# Altium PCB TSAL_Control.PcbDoc (part 3 of 3)
Units mm, origin at the board's own origin, x right, y up, seen from the top; angles counter-clockwise.
Board outline 110 x 55.6 mm, 4 copper layers (Top Layer, GND, PWR, Bottom Layer), stack 1.488 mm thick; 121 components, 67 nets, 352 pads, 66 vias.
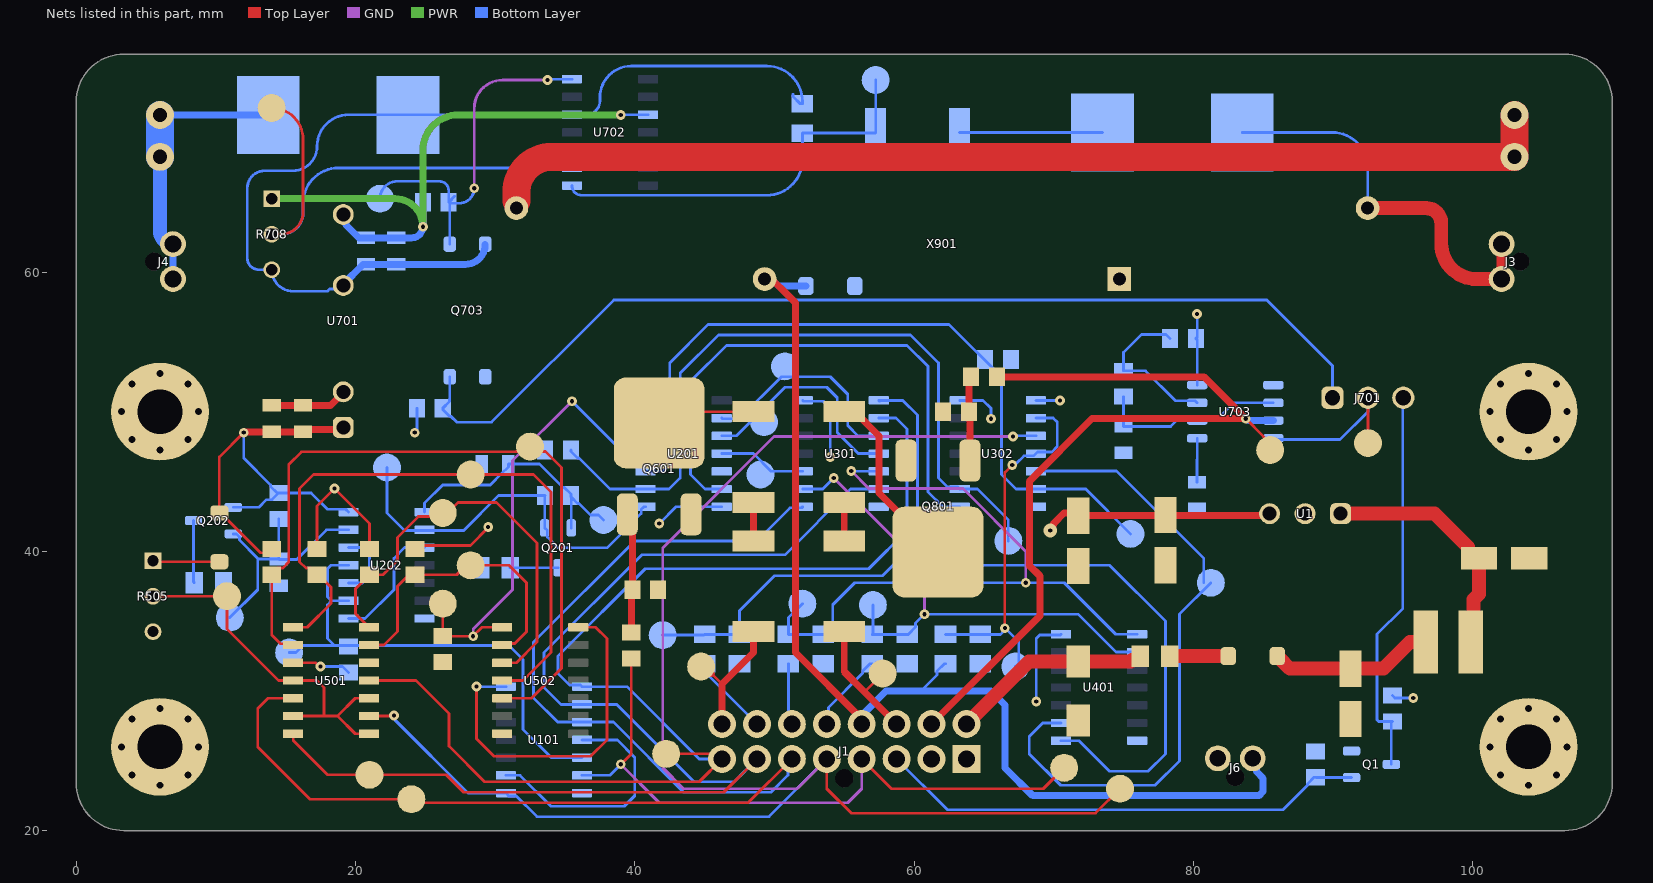
[diagram p4: the nets of this part, all layers, seen from the top]

## Part data (continued)
U301: library part CMP-00216-1, "XOR Gate, 4000/14000/40000 Series, 4-Func, 2-Input, CMOS, PDSO14", Case/Package=SOP, Load Capacitance (CL)=50pF, Max Operating Temperature=125°C, Max Supply Voltage=18V, Min Operating Temperature=-55°C, Min Supply Voltage=3V, Nominal Supply Voltage=5V, Package Body Material=Plastic, Package Equivalence Code=SOP14,.25, Package Shape=Rectangular, Package Style="SMALL OUTLINEMeter", Peak Reflow Temperature (Cel)=260°C, Power Supplies=5/15V, Temperature Grade=MILITARY, Channels=4, Height - Seated (Max)=1.75mm, JESD-30 Code=R-PDSO-G14, JESD-609 Code=e4, Length=8.65mm, Logic Type="XOR GATE", Moisture Sensitivity Level=1, Number of Inputs=2, Packaging="Tape and Reel", Pins=14, Prop. Delay@Nom-Sup=280ns, Propagation Delay (tpd)=280ns, Qualification Status="Not Qualified", Reach SVHC Compliant=Yes, RoHS Compliant=Yes, Schmitt Trigger=No, Surface Mount=Yes, Technology=CMOS, Terminal Finish=Nickel, Terminal Form="Gull Wing", Terminal Pitch=1.27mm, Terminal Position=DUAL, Width=3.9mm
U401: library part CMP-00215-1, "NAND Gate, 4000/14000/40000 Series, 3-Func, 3-Input, CMOS, CDIP14", Case/Package=DIP, Max Operating Temperature=125°C, Max Supply Voltage=15V, Min Operating Temperature=-55°C, Min Supply Voltage=5V, Nominal Supply Voltage=10V, Package Body Material=Metal, Package Shape=Rectangular, Package Style=IN-LINEMeter, Temperature Grade=MILITARY, Channels=3, Height - Seated (Max)=5.08mm, Logic Type="NAND GATE", Number of Inputs=3, Pins=14, Propagation Delay (tpd)=250ns, Qualification Status="Not Qualified", Surface Mount=No, Technology=CMOS, Terminal Form="Through Hole", Terminal Pitch=2.54mm, Terminal Position=DUAL, Width=7.62mm
U501 U702: library part CMP-014-00006-1, "Comparator, 4 Func, 5000uV Offset-Max, 300ns Response Time, BIPolar, PDSO14", Case/Package=SOP, Max Operating Temperature=70°C, Min Operating Temperature=0°C, Nominal Supply Voltage=5V, Channels=4, Output Type=OPEN-COLLECTOR, Pins=14, RoHS Compliant=Yes
U701: library part CMP-019-00001-1, "WPME-FISM Fixed Isolated SIP/SMT Module"
U703: library part CMP-00181-3, "Precision timer for -55 to 85C operation 8-SOIC -40 to 85", Case/Package=SOIC, Frequency=500kHz, High Level Output Current=-200mA, Low Level Output Current=200mA, Manufacturer="Texas Instruments", Manufacturer Part Number=SA555D, Max Operating Temperature=85°C, Max Supply Voltage=16V, Min Operating Temperature=-40°C, Min Supply Voltage=4.5V, Nominal Supply Current=2mA, Operating Supply Current=10mA, Package Quantity=75, Quiescent Current=15mA, .Creator=DO, Category="Timers and Oscillators", ComponentLink1Description=https://datasheet.ciiva.com/1147/na555-1147816.pdf?src-supplier=Newark, ComponentLink1URL=https://datasheet.ciiva.com/1147/na555-1147816.pdf?src-supplier=Newark, ComponentLink2Description=https://datasheet.ciiva.com/14094/ne555-series-eng-tds-14094951.pdf?src-supplier=Distrelec, ComponentLink2URL=https://datasheet.ciiva.com/14094/ne555-series-eng-tds-14094951.pdf?src-supplier=Distrelec, ComponentLink3Description=https://datasheet.ciiva.com/1233/sa555-1233455.pdf?src-supplier=Digi-Key, ComponentLink3URL=https://datasheet.ciiva.com/1233/sa555-1233455.pdf?src-supplier=Digi-Key, ComponentLink4Description=https://datasheet.ciiva.com/1139/1851962-1139987.pdf?src-supplier=Element14, ComponentLink4URL=https://datasheet.ciiva.com/1139/1851962-1139987.pdf?src-supplier=Element14, ComponentLink5Description=https://datasheet.ciiva.com/15152/getdatasheetpartid-75292-15152565.pdf?src-supplier=Verical, ComponentLink5URL=https://datasheet.ciiva.com/15152/getdatasheetpartid-75292-15152565.pdf?src-supplier=Verical, ComponentLink6Description="Where buy it", ComponentLink6URL=https://www.mouser.es/ProductDetail/Texas-Instruments/SA555D?qs=gb35HGp1gQJkvy2FEVqR%2Fw%3D%3D, Contact Plating=Gold, Design Item ID=Timer_SA555, Height=1.58mm, Lead Free="Lead Free", Length=4.9mm, Mount="Surface Mount", Number of Pins=8, Number of Timers/Counters=1, Packaging=Rail/Tube, Pricing 1="1=0,93000, 10=0,83500, 25=0,79240, 100=0,65090, 250=0,60848, 500=0,53774, 1000=0,46725 (USD)", Radiation Hardening=No, REACH SVHC="No SVHC", RoHS=Yes, RoHS Compliant=Yes, Source="Integrated circuits.SchLib", Stock 1=1162, Weight=0.002561oz, Width=3.91mm
X901: library part CMP-00224-2, "Dry Reed Relay, SPST-NC, 3500V switching voltage, 3A, 10kV isolation coil-contacts, 5504-24-1", JESD-609 Code=e3, Reach SVHC Compliant=Yes, Relay Type="DRY REED RELAY", RoHS Compliant=Yes, Terminal Finish=Tin

## Via types
v1: diameter 0.7, hole 0.5, Top Layer to Bottom Layer, tented both sides, 32 vias
v2: diameter 0.7, hole 0.3, Top Layer to Bottom Layer, tented both sides, 29 vias
v3: diameter 1.5, hole 1.5, Top Layer to Bottom Layer, tented both sides, 4 vias
v4: diameter 1, hole 0.3, Top Layer to Bottom Layer, tented both sides, 1 vias

## Nets (pads, with @x,y where several pads share a name; then routed paths per layer and width w, separated by ;. In a path a pad name is that pad's centre, name@x,y a point inside that pad or via, vN(x,y) a via of type N, cw(c..) or ccw(c..) an arc to the next point about the centre after c; other vN are vias at no path point)
+5TS: C701.1 C702.1 R706.1 R708.1 U701.4 U702.3 | length 43.9
  PWR w0.5: R708.1@14,65.25 22.825,65.25 cw(c22.825,63.25) v2(24.825,63.25) 24.825,68.71 cw(c27.365,68.71) 27.365,71.25 v2(39,71.25)
  Bottom Layer w0.2: v2(39,71.25) 39.02,71.27 U702.3@40.95,71.27
  Bottom Layer w0.5: U701.4@19.125,64.12 19.316,63.929 19.316,63.384 20.25,62.45 C701.1@22.921,62.45 ; C701.1@22.921,62.45 24.025,62.45 ccw(c24.025,63.25) v2(24.825,63.25) R706.1@24.825,65
+12: C3.1 C4.1 C703.1 C704.1 D501.K J1.7 Q202.G R1.1 R111.2 R202.1 R501.1 R502.1 R503.1 R504.1 R702.1 R704.1 U1.3 U101.14 U201.14 U202.14 U301.14 U302.1 U302.14 U401.14 U501.3 U502.14 U701.1 U703.8 | length 126.5
  Top Layer w0.2: v2(12,48.5) 10.25,46.75 D501.K@10.25,42.75 10.35,42.75 13.2,39.9 13.725,39.9 R502.1@14,40.175 ; U501.3@15.525,32.02 17.133,32.02 v2@17.403,31.75 ; R501.1@17.25,40.175 17.25,43.25 v2(18.5,44.5) 21,42 R503.1@21,40.175 ; R504.1@24.5,40.175 24.75,40.425 28.234,40.425 29.5,41.691 v2(29.5,41.75) ; v2(28.669,30.328) 28.669,26.581 29.919,25.331 36.831,25.331 38,26.5 38,33.75 37.19,34.56 U502.14@35.95,34.56
  Top Layer w0.5: v2(12,48.5) 12.054,48.5 12.104,48.55 C703.1@14,48.55 C704.1@16.25,48.55 16.415,48.715 18.96,48.715 U701.1@19.125,48.88 ; v4(69.75,41.5) 69.75,41.635 70,41.885 70,42 70.75,42.75 71.55,42.75 C3.1@71.75,42.55 85.31,42.55 U1.3@85.46,42.7
  Bottom Layer w0.2: Q202.G@11.25,43.15 13.069,43.15 13.619,43.7 14.025,43.7 R202.1@14.5,44.175 ; v2(12,48.5) 12,46.675 13.925,44.75 13.925,44.65 14.4,44.175 R202.1@14.5,44.175 ; v2(17.5,31.75) 19.075,31.75 R111.2@19.5,31.325 ; U202.14@19.5,42.81 19.3,43.01 17.99,43.01 16.825,44.175 R202.1@14.5,44.175 ; v2(24.25,48.5) 24.4,48.65 R702.1@24.4,50.25 ; v2(28.669,30.328) 28.672,30.328 28.75,30.25 28.81,30.31 U101.14@30.775,30.31 ; v2@41.768,42 42.958,43.19 U201.14@46.225,43.19 ; U301.14@52.025,50.81 52.085,50.75 53.5,50.75 54,50.25 v2(54,46.75) ; U302.14@63.275,50.81 64.94,50.81 65.5,50.25 v2(65.5,49.5) ; U302.1@68.725,50.81 v2(70.44,50.81) ; v2(68.75,29.25) 68.75,33.75 69,34 70.465,34 U401.14@70.525,34.06 ; v2(80.25,57) 80.275,56.975 80.275,55.35 R704.1@80.175,55.25 80.275,55.15 U703.8@80.275,51.905 ; R1.1@94.25,29.675 94.425,29.5 v2(95.75,29.5)
  other v2: 41.75,42
AIR+_Coil: AIR+_COIL.1 R3.2 R4.1 U301.1 U401.8 | length 73.9
  Bottom Layer w0.2: AIR+_COIL.1@42,34 44.95,34 R3.2@45,34.05 R4.1@47.5,34.05 47.5,35.75 50,38.25 57.75,38.25 58.5,39 ; U301.1@57.535,50.75 U301.1@57.475,50.81 59.19,50.81 60.25,49.75 60.25,40.75 58.5,39 ; U401.8@70.525,26.44 71.81,26.44 74,24.25 76.75,24.25 78,25.5 78,35 74,39 58.5,39
AIR+_Coil_30V: J1.10 R3.1 | length 5.9
  Bottom Layer w0.2: R3.1@45,31.95 45.238,31.712 45.238,31.142 J1.10@48.75,27.631
AIR+_Implausibility: AIR+_IMPL.1 U201.9 U301.3 | length 15.6
  Bottom Layer w0.2: U201.9@46.225,49.54 46.265,49.5 47.5,49.5 50.5,52.5 54,52.5 55.25,51.25 55.25,49 55.98,48.27 U301.3@57.475,48.27
AIR+_SCS: AIR+_SCS.1 R502.2 U501.2 U502.5 | length 55
  Top Layer w0.2: U501.2@15.525,33.29 15.432,33.383 14.617,33.383 14,34 R502.2@14,38.325 14.475,38.8 14.8,38.8 15.225,39.225 15.225,46.225 16.125,47.125 31.483,47.125 31.513,47.156 32.094,47.156 32.125,47.125 AIR+_SCS.1@32.5,47.5 32.844,47.156 33.594,47.156 34.75,46 34.75,31.628 32.602,29.48 U502.5@30.5,29.48
AIR+_State: AIR+_STATE.1 J1.1 U101.1 U301.2 U501.11 | length 88.3
  Top Layer w0.2: U501.11@20.975,30.75 24.338,30.75 26.7,28.388 26.7,26.05 29.25,23.5 44.619,23.5 J1.1@46.25,25.131 45.763,25.131 45.393,25.5 AIR+_STATE.1@42.25,25.5
  Bottom Layer w0.2: J1.1@46.25,25.131 44.619,25.131 39.44,30.31 U101.1@36.225,30.31 36.108,30.427 35.323,30.427 34.5,31.25 34.5,32.5 40.75,38.75 56.75,38.75 59.5,41.5 59.5,48.75 58.71,49.54 U301.2@57.475,49.54
AIR-_Coil: AIR-_COIL.1 R5.2 R6.1 U301.5 U401.1 | length 50.7
  GND w0.2: v2@55.51,45.74 56.75,44.5 63.5,44.5 68,40 v2(68,37.75)
  Bottom Layer w0.2: AIR-_COIL.1@52,36.25 51,35.25 R5.2@51,34.05 53.5,34.05 53.65,34.05 54.175,34.575 54.175,36.175 55.75,37.75 70.75,37.75 74.44,34.06 U401.1@75.975,34.06 ; v2(55.5,45.75) 55.52,45.73 U301.5@57.475,45.73
AIR-_Coil_30V: J1.11 R5.1 | length 4.4
  Bottom Layer w0.2: R5.1@51,31.95 51,27.881 J1.11@51.25,27.631
AIR-_Implausibility: AIR-_IMPL.1 U201.10 U301.4 | length 16.1
  Bottom Layer w0.2: U201.10@46.225,48.27 47.27,48.27 50.75,51.75 53.75,51.75 54.5,51 54.5,48.5 56,47 U301.4@57.475,47
AIR-_SCS: AIR-_SCS.1 R503.2 U501.14 U502.3 | length 31.3
  Top Layer w0.2: U501.14@20.975,34.56 20,35.535 20,37.325 R503.2@21,38.325 21.975,38.325 23,39.35 23,41 24.5,42.5 26.164,42.5 AIR-_SCS.1@26.414,42.75 ; AIR-_SCS.1@26.25,42.75 AIR-_SCS.1@26.414,42.75 ; U502.3@30.5,32.02 31.52,32.02 33,33.5 33,40.599 30.099,43.5 27.338,43.5 26.588,42.75 AIR-_SCS.1@26.414,42.75
AIR-_State: AIR-_STATE.1 J1.2 U101.2 U301.6 U501.7 | length 86.3
  Top Layer w0.2: U501.7@15.525,26.94 15.543,26.922 15.543,26.457 18,24 AIR-_STATE.1@21,24 26.5,24 27.75,22.75 46.369,22.75 J1.2@48.75,25.131
  Bottom Layer w0.2: J1.2@48.75,25.131 47.119,23.5 44.25,23.5 38.71,29.04 U101.2@36.225,29.04 34.71,29.04 33.5,30.25 33.5,32.75 40.5,39.75 50.75,39.75 55.46,44.46 U301.6@57.475,44.46
Discharge_Resistor: J2.1 J2.2 X901.1 | length 76.6
  Top Layer w2: X901.1@31.52,65.08 31.52,65.71 cw(c34.06,65.71) 34.06,68.25 J2.1@103,68.25 J2.2@103,71.25
GND: C1.2 C2.2 C3.2 C4.2 C201.2 C202.2 C703.2 C704.2 C705.2 C706.2 D1.2 D901.A J1.8 J6.1 MH1.1 MH2.1 MH3.1 MH4.1 Q1.S Q601.S Q703.3 Q801.S R2.2 R4.2 R6.2 R8.2 R10.2 R203.2 R204.2 R333.1 R444.1 R505.2 R555.1 R602.2 R802.2 U1.2 U101.7 U201.5 U201.7 U201.12 U202.7 U301.7 U302.7 U401.7 U501.12 U502.7 U701.2 U703.1 X901.3 | length 11.1
  Top Layer w0.2: v1(3.25,26) MH1.1@6,26
  Top Layer w0.5: C703.2@14,50.45 C704.2@16.25,50.45 18.207,50.45 19.125,51.368 U701.2@19.125,51.42 ; MH3.1@104,50 v1(104,52.75)
  other v1: 6,23.25 104,23.25 4,24 8,24 102,24 106,24 8.75,26 101.25,26 106.75,26 4,28 8,28 102,28 106,28 6,28.75 104,28.75 6,47.25 104,47.25 4,48 8,48 102,48 106,48 3.25,50 8.75,50 101.25,50 106.75,50 4,52 8,52 102,52 106,52 6,52.75
HV_Accu_SCS: HV_ACCU_SCS.1 R501.2 U501.1 U502.4 | length 47.6
  Top Layer w0.2: U501.1@15.525,34.56 16.55,34.56 18.25,36.26 18.25,37.425 17.35,38.325 R501.2@17.25,38.325 16.775,38.8 16.45,38.8 16,39.25 16,44.5 17,45.5 32.75,45.5 34,44.25 34,32.75 32,30.75 U502.4@30.5,30.75
HV_Accumulator: HV_ACCU.1 J1.4 U101.8 U302.3 U501.9 | length 121.3
  Top Layer w0.2: U501.9@20.975,28.21 22.71,28.21 v2(22.75,28.25) ; J1.4@53.75,25.131 53.75,23 55.5,21.25 73,21.25 HV_ACCU.1@74.75,23
  GND w0.2: J1.4@53.75,25.131 51.619,23 43.5,23 42,24.5 42,40.25 49.981,48.231 v2(67.081,48.231)
  Bottom Layer w0.2: v2(22.75,28.25) 22.846,28.154 22.846,27.904 28.06,22.69 U101.8@30.775,22.69 30.975,22.49 31.51,22.49 33,21 49.619,21 J1.4@53.75,25.131 ; v2(67.081,48.231) 67.231,48.231 67.27,48.27 U302.3@68.725,48.27
HV_Detection_DCBus: J701.1 Q703.4 R702.2 | length 74.5
  Bottom Layer w0.2: Q703.4@26.75,52.5 26.75,50.942 26.725,50.917 26.725,50.725 R702.2@26.25,50.25 26.25,50.15 26.725,49.675 26.825,49.675 27.25,49.25 29.75,49.25 38.5,58 85.25,58 89.96,53.29 J701.1@89.96,51
HV_Detection_Trigger: HV_DET_TRIG.1 J701.2 U703.4 | length 11.9
  Top Layer w0.2: HV_DET_TRIG.1@92.5,47.75 J701.2@92.5,51
  Bottom Layer w0.2: U703.4@85.725,48.095 85.82,48 90.5,48 92.5,50 J701.2@92.5,51
Implausibilities: C201.1 IMPLAUSIBILITIES.1 Q201.S R201.2 U202.1 | length 18.7
  Bottom Layer w0.2: U202.1@24.95,42.81 24.95,43.45 26.25,44.75 29.65,44.75 30.467,45.567 30.95,46.05 C201.1@30.95,46.25 33.175,46.25 34.85,44.575 34.95,44.575 35.425,44.1 R201.2@35.425,44 35.425,43.9 R201.2@35.45,43.875 ; Q201.S@35.45,41.675 R201.2@35.45,43.875 ; IMPLAUSIBILITIES.1@37.75,42.25 37.406,42.594 36.831,42.594 36,43.425 35.9,43.425 R201.2@35.45,43.875
Implausibilities_Undelayed: IMPL_UNDLY.1 Q201.G R201.1 U201.1 U202.2 | length 27.9
  Bottom Layer w0.2: IMPL_UNDLY.1@22.25,46 22.25,42.75 23.5,41.5 27.75,41.5 30.25,44 R201.1@33.575,44 33.55,43.975 Q201.G@33.55,41.675 33.736,41.489 33.736,41.014 34.5,40.25 38,40.25 40.457,42.707 40.457,42.99 40.657,43.19 U201.1@40.775,43.19
INV_HV_Detection: J701.3 Q1.D R1.2 | length 28.1
  Bottom Layer w0.2: Q1.D@94.175,24.75 94.175,27.75 R1.2@94.25,27.825 93.275,27.825 93.158,27.942 93.158,34.069 95,35.912 95,50.96 J701.3@95.04,51
INV_HV_Detection5V: J1.6 Q1.G R2.1 | length 35.1
  Bottom Layer w0.2: J1.6@58.75,25.131 62.381,21.5 86.425,21.5 88.175,23.25 88.175,23.35 88.65,23.825 R2.1@88.75,23.825 88.775,23.8 Q1.G@91.325,23.8
Latch_Reset: C202.1 LATCH_RST.1 Q202.S R202.2 U202.13 | length 18
  Bottom Layer w0.2: LATCH_RST.1@11,35.25 13,37.25 13,39.5 ; Q202.S@11.25,41.25 11.469,41.25 11.69,41.03 11.69,40.81 13,39.5 ; R202.2@14.5,42.325 C202.1@14.5,39.45 ; U202.13@19.5,41.54 17.923,41.54 15.79,39.407 14.543,39.407 C202.1@14.5,39.45 ; 13,39.5 13.05,39.45 C202.1@14.5,39.45
LV+_in: D1.1 F1.1 J1.16 | length 14.6
  Top Layer w1: J1.16@63.75,27.631 68.22,32.1 D1.1@71.75,32.1 75.489,32.1 75.614,32.225 76.075,32.225 76.2,32.35 F1.1@76.2,32.5
NetC1_1: C1.1 D2.K L1.1 | length 11.8
  Top Layer w1: D2.K@86,32.5 86,32.4 86.05,32.35 86.15,32.35 86.9,31.6 C1.1@91.25,31.6 93.6,31.6 95.5,33.5 L1.1@96.625,33.5
NetC2_1: C2.1 L1.2 U1.1 | length 17.8
  Top Layer w1: U1.1@90.54,42.7 97.25,42.7 99.65,40.3 99.65,39.8 99.95,39.5 C2.1@100.45,39.5 100.45,36.95 100.061,36.561 100.061,33.686 L1.2@99.875,33.5
NetC705_1: C705.1 U703.5 | length 3.2
  Bottom Layer w0.2: C705.1@80.25,44.95 80.25,46.587 80.275,46.612 U703.5@80.275,48.095
NetC706_1: C706.1 R705.2 U703.2 U703.6 | length 13.5
  Bottom Layer w0.2: R705.2@75,51.075 C706.1@75,48.95 78.374,48.95 78.789,49.365 U703.6@80.275,49.365 81.615,49.365 82.885,50.635 U703.2@85.725,50.635
NetD2_A: D2.A F1.2 | length 4.2
  Top Layer w1: F1.2@78.3,32.5 D2.A@82.5,32.5
NetD501_A: D501.A R505.1 | length 4.8
  Top Layer w0.2: R505.1@5.5,39.33 5.58,39.25 D501.A@10.25,39.25
NetQ201_D: Q201.D R203.1 | length 3.5
  Bottom Layer w0.2: R203.1@31.071,38.829 R203.1@31.141,38.829 ; R203.1@31.141,38.9 31.216,38.825 Q201.D@34.5,38.825
NetQ202_D: Q202.D R204.1 | length 4.5
  Bottom Layer w0.2: Q202.D@8.4,42.2 8.4,37.8 R204.1@8.45,37.75
NetQ601_D: Q601.D R604.2 | length 7.1
  Top Layer w0.2: Q601.D@41.75,49.2 42.55,50 R604.2@48.5,50
NetQ601_G: Q601.G R601.2 R602.1 | length 8.7
  Top Layer w0.5: Q601.G@39.464,42.65 39.825,42.289 R602.1@39.825,37.25 39.75,37.175 R601.2@39.75,34.175
NetQ801_D: Q801.D R804.2 | length 13.3
  Top Layer w0.5: R804.2@55,50 55.75,50 57.5,48.25 57.5,44.164 Q801.D@61.714,39.95
NetQ801_G: Q801.G R801.2 R802.1 | length 6.1
  Top Layer w0.5: Q801.G@64,46.5 64,49.925 R802.1@63.925,50 63.925,52.35 R801.2@64.075,52.5
NetR603_2: R603.2 R604.1 | length 2.7
  Top Layer w0.5: R603.2@48.5,40.75 R604.1@48.5,43.5
NetR704_2: R704.2 R705.1 U703.7 | length 11.5
  Bottom Layer w0.2: R704.2@78.325,55.25 78.05,55.525 76.275,55.525 75,54.25 R705.1@75,52.925 76.575,52.925 78.714,50.786 80.124,50.786 U703.7@80.275,50.635
NetR803_2: R803.2 R804.1 | length 2.7
  Top Layer w0.5: R803.2@55,40.75 R804.1@55,43.5
NetU101_4: U101.4 U101.9 | length 17.5
  Bottom Layer w0.2: U101.9@30.775,23.96 31.79,23.96 34,21.75 39.25,21.75 40,22.5 40,25.25 38.75,26.5 U101.4@36.225,26.5
No_Voltage_Relays_Closed: NO_HV_REL_CLS.1 R444.2 U201.3 U302.6 | length 53.6
  Bottom Layer w0.2: U201.3@40.775,45.73 41.98,45.73 42.5,46.25 42.5,53.5 45.25,56.25 62.5,56.25 66.25,52.5 66.25,45.5 67.29,44.46 U302.6@68.725,44.46 72.29,44.46 NO_HV_REL_CLS.1@75.5,41.25
Not_Intentional_Relay_State: NOT_INT_REL_STATE.1 U302.5 U401.9 | length 46.4
  Bottom Layer w0.2: U302.5@68.725,45.73 68.745,45.75 74.5,45.75 80.75,39.5 NOT_INT_REL_STATE.1@80.75,37.75 ; U401.9@70.525,27.71 69.21,27.71 68.25,26.75 68.25,25.5 70.5,23.25 77.25,23.25 79,25 79,35.5 NOT_INT_REL_STATE.1@81.25,37.75
Not_Safe_State: U202.10 U202.12 | length 4.9
  Bottom Layer w0.2: U202.10@19.5,37.73 20.48,37.73 21,38.25 21,39.75 20.48,40.27 U202.12@19.5,40.27
Out_HV_Comparator: Out_HV_Comparator.1 Q703.1 R706.2 U702.14 | length 27
  GND w0.2: v2@28.5,65.785 v2(28.5,66) 28.5,71.71 cw(c30.54,71.71) 30.54,73.75 v2(33.75,73.75)
  Bottom Layer w0.2: Out_HV_Comparator.1@21.75,65.25 cw(c23,65.25) 23,66.5 26,66.5 cw(c26,65.825) 26.675,65.825 R706.2@26.675,65 ; Q703.1@26.75,62 R706.2@26.75,64.925 ; R706.2@27.108,65.433 R706.2@26.675,65 ; v2(28.5,66) cw(c27.425,66) 27.425,64.925 R706.2@26.75,64.925 ; v2(33.75,73.75) 33.81,73.81 U702.14@35.5,73.81 ; R706.2@26.675,65 cw(c26.675,64.925) R706.2@26.75,64.925
Precharge_Coil: PRE_COIL.1 R7.2 R8.1 U301.9 U401.2 | length 38
  GND w0.2: v2(54.25,45.25) 60.75,38.75 v2(60.75,35.5)
  Bottom Layer w0.2: U301.9@52.025,44.46 53.46,44.46 v2(54.25,45.25) ; PRE_COIL.1@57.05,36.158 57.05,34.1 R7.2@57,34.05 59.583,34.05 60.107,34.575 60.107,34.857 v2(60.75,35.5) 71.75,35.5 74.46,32.79 U401.2@75.975,32.79
Precharge_Coil_30V: J1.12 R7.1 | length 5.8
  Bottom Layer w0.2: J1.12@53.75,27.631 53.863,27.744 53.863,28.813 56.325,31.275 56.325,31.425 56.85,31.95 R7.1@57,31.95
Precharge_Implausibility: PRE_IMPL.1 U201.11 U301.10 | length 6.3
  Bottom Layer w0.2: U201.11@46.225,47 48.5,47 49.77,45.73 U301.10@52.025,45.73
Precharge_SCS: PRE_SCS.1 R504.2 U501.13 U502.2 | length 23.3
  Top Layer w0.2: U501.13@20.975,33.29 22.04,33.29 23,34.25 23,37.5 23.642,38.142 24.317,38.142 24.5,38.325 27.252,38.325 27.502,38.575 27.825,38.575 PRE_SCS.1@28.25,39 ; PRE_SCS.1@27.584,38.821 PRE_SCS.1@27.584,38.834 ; PRE_SCS.1@27.825,38.594 PRE_SCS.1@27.584,38.834 ; PRE_SCS.1@28.575,39.325 PRE_SCS.1@28.25,39 ; U502.2@30.5,33.29 30.612,33.402 31.407,33.402 32.25,34.245 32.25,37.75 31,39 PRE_SCS.1@28.25,39 ; PRE_SCS.1@27.584,38.834 27.75,39 PRE_SCS.1@28.25,39
Precharge_State: J1.3 PRE_STATE.1 U101.3 U301.8 U501.5 | length 96.9
  Top Layer w0.2: U501.5@15.525,29.48 13.73,29.48 13,28.75 13,26 16.75,22.25 PRE_STATE.1@24,22.25 24.25,22 48.119,22 J1.3@51.25,25.131
  Bottom Layer w0.2: J1.3@51.25,25.131 50.971,24.852 50.971,23.971 49.75,22.75 43.5,22.75 38.48,27.77 U101.3@36.225,27.77 34.48,27.77 32.75,29.5 32.75,33.5 40,40.75 48.75,40.75 51.117,43.117 51.952,43.117 U301.8@52.025,43.19
Relays_Implausibility: R333.2 RELAYS_IMPL.1 U201.2 U302.9 | length 53.3
  Bottom Layer w0.2: R333.2@35.425,47.25 35.425,47.15 35.9,46.675 36,46.675 38.215,44.46 U201.2@40.775,44.46 42.46,44.46 43.25,45.25 43.25,52.75 46,55.5 59.75,55.5 61.75,53.5 61.75,45.25 62.398,44.602 63.133,44.602 U302.9@63.275,44.46 64.54,44.46 66.75,42.25 RELAYS_IMPL.1@66.75,40.75
Relays_State_Detection: RELAY_STATE_DET.1 U201.13 U302.8 | length 42.2
  Bottom Layer w0.2: U201.13@46.225,44.46 45.04,44.46 44,45.5 44,52.183 46.567,54.75 59.5,54.75 61,53.25 61,44.25 62.06,43.19 U302.8@63.275,43.19 63.25,43.165 RELAY_STATE_DET.1@63.25,40.75
Safe_State: R111.1 SAFE_STATE.1 U101.5 U202.9 U202.11 | length 36.2
  Bottom Layer w0.2: SAFE_STATE.1@15.25,32.75 15.737,32.75 16.237,33.25 18.5,33.25 ; U202.9@19.5,36.46 18.29,36.46 ; U202.11@19.5,39 18.25,39 18,38.75 18,36.75 18.29,36.46 ; U101.5@36.225,25.23 34.02,25.23 32,27.25 32,32.25 31,33.25 19.5,33.25 18.5,33.25 ; 18.29,36.46 18,36.17 18,33.75 18.5,33.25
Safe_State_Unlatched: U202.3 U202.8 | length 8.9
  Bottom Layer w0.2: U202.8@19.5,35.19 20.69,35.19 22.75,37.25 22.75,39.5 23.52,40.27 U202.3@24.95,40.27
SC_End: R9.2 R10.1 SC_END.1 U302.2 U302.4 | length 26.9
  Top Layer w0.2: v2(66.5,34.5) 66.5,45.655 v2(67.034,46.188)
  Bottom Layer w0.2: R9.2@62.25,34.05 R10.1@64.75,34.05 66.196,34.05 66.404,34.258 66.404,34.404 v2(66.5,34.5) 67.5,33.5 67.5,32 SC_END.1@67.25,31.75 ; v2(67.034,46.188) 67.129,46.284 67.313,46.284 67.867,46.838 68.563,46.838 U302.4@68.725,47 68.847,47.122 69.872,47.122 70.25,47.5 70.25,49.25 69.96,49.54 U302.2@68.725,49.54
SC_End_30V: D901.K J1.13 J6.2 R9.1 X901.2 | length 80
  Top Layer w0.5: X901.2@49.3,60 51.5,57.8 51.5,32.75 56.25,28 J1.13@56.25,27.631
  Bottom Layer w0.2: 60.5,30 61.642,31.142 61.642,31.425 62.167,31.95 R9.1@62.25,31.95
  Bottom Layer w0.5: X901.2@49.3,60 50.3,59 D901.K@52.25,59 ; J1.13@56.25,27.631 56.537,27.918 56.537,28.537 58,30 60.5,30 65.5,30 66.5,29 66.5,24.5 68.5,22.5 84.707,22.5 85,22.793 85,23.75 84.508,24.242 84.508,24.922 J6.2@84.25,25.18
SCS_Error: R555.2 SCS_ERROR.1 U201.4 U502.1 | length 33.4
  Top Layer w0.2: SCS_ERROR.1@26.25,36.25 R555.2@26.25,33.925 v2(28.425,33.925) 29.06,34.56 U502.1@30.5,34.56
  GND w0.2: v2(28.425,33.925) 28.435,33.935 28.435,34.435 31.25,37.25 31.25,46.5 v2(35.5,50.75)
  Bottom Layer w0.2: v2(35.5,50.75) 39.25,47 U201.4@40.775,47
TS+_DCBus1: F3.1 R709.1 | length 10.2
  Bottom Layer w0.2: R709.1@63.25,70 F3.1@73.5,70
TS+_DCBus1_Unfused: F3.2 J3.1 J3.2 X901.4 | length 28.4
  Top Layer w0.75: J3.1@102.07,59.5 J3.2@102.07,62
  Top Layer w1: X901.4@92.48,64.58 96.67,64.58 cw(c96.67,63.5) 97.75,63.5 97.75,62.04 ccw(c100.29,62.04) 100.29,59.5 J3.1@102.07,59.5
  Bottom Layer w0.2: F3.2@83.5,70 89.94,70 cw(c89.94,67.46) 92.48,67.46 X901.4@92.48,65.08
TS-: C701.2 C702.2 F4.1 Q703.2 R708.2 R710.2 U701.3 U702.12 | length 72.6
  Bottom Layer w0.2: U701.3@19.125,59.04 18.876,58.791 18.146,58.791 17.975,58.62 15.55,58.62 cw(c15.55,60.17) R708.2@14,60.17 13.08,60.17 cw(c13.08,61) 12.25,61 12.25,66 cw(c13.5,66) 13.5,67.25 15.5,67.25 ccw(c15.5,69) 17.25,69 cw(c19.52,69) 19.52,71.27 23.75,71.27 U702.12@35.5,71.27 36.52,71.27 ccw(c36.52,72.25) 37.5,72.25 37.5,72.5 cw(c39.75,72.5) 39.75,74.75 49.46,74.75 cw(c49.46,72.21) 52,72.21 R710.2@52,72.05 51.85,72.05 51.325,72.575 51.325,72.725
  Bottom Layer w0.5: U701.3@19.125,59.04 19.125,59.125 20.55,60.55 C701.2@22.921,60.55 ; C701.2@22.921,60.55 27.873,60.55 ccw(c27.873,61.968) Q703.2@29.29,61.968
TS-_Unfused: F4.2 J4.1 J4.2 J5.1 J5.2 | length 20
  Bottom Layer w0.5: J5.1@6,71.25 F4.2@13.75,71.25 ; J4.2@6.93,59.5 J4.1@6.93,62
  Bottom Layer w1: J5.2@6,68.25 6,62.93 ccw(c6.93,62.93) J4.1@6.93,62
  Bottom Layer w2: J5.2@6,68.25 J5.1@6,71.25
TS_Off: J1.5 R601.1 TS_OFF.1 U101.6 | length 47.9
  Top Layer w0.2: v2(39,24.75) 39.75,25.5 R601.1@39.75,32.325 ; J1.5@56.25,25.131 58.381,23 69.25,23 TS_OFF.1@70.75,24.5
  GND w0.2: v2@39.01,24.74 41.75,22 55.25,22 56.25,23 J1.5@56.25,25.131
  Bottom Layer w0.2: U101.6@36.225,23.96 38.21,23.96 v2(39,24.75)
TS_On: J1.15 R801.1 TS_ON.1 U703.3 | length 62.3
  Top Layer w0.2: v2(83.75,49.5) 85.031,48.219 85.031,48.206 85.5,47.737 TS_ON.1@85.5,47.25
  Top Layer w0.5: J1.15@61.25,27.631 69,35.381 69,38.25 68.25,39 68.25,45 72.75,49.5 v2(83.75,49.5) 80.75,52.5 R801.1@65.925,52.5
  Bottom Layer w0.5: v2(83.75,49.5) 83.804,49.5 83.939,49.365 U703.3@85.725,49.365
TSAL_Green: J1.9 R603.1 TSAL_GREEN.1 | length 10
  Top Layer w0.2: TSAL_GREEN.1@45.487,31.263 46.25,30.5
  Top Layer w0.5: TSAL_GREEN.1@44.25,31.5 44.487,31.263 TSAL_GREEN.1@45.487,31.263 ; J1.9@46.25,27.631 46.25,30.5 48.5,32.75 R603.1@48.5,34.25
TSAL_Red: J1.14 R803.1 TSAL_RED.1 | length 10
  Top Layer w0.2: 56.44,29.94 TSAL_RED.1@57.75,31.25
  Top Layer w0.5: R803.1@55,34.25 55,31.381 56.44,29.94 J1.14@58.75,27.631
V_REF: R505.3 U501.4 U501.6 U501.8 U501.10 V_REF.1 | length 27.2
  Top Layer w0.2: R505.3@5.5,36.79 5.54,36.75 5.58,36.79 V_REF.1@10.798,36.79 10.798,34.452 14.5,30.75 U501.4@15.525,30.75 17.25,30.75 17.75,30.25 17.75,28.21 ; U501.6@15.525,28.21 17.75,28.21 ; U501.8@20.975,26.94 19.98,26.94 18.71,28.21 ; U501.10@20.975,29.48 19.98,29.48 18.71,28.21 ; 17.75,28.21 18.71,28.21
Voltage_DCBus1: R709.2 R710.1 U702.8 Voltage_DCBus1.1 | length 29.3
  Bottom Layer w0.2: U702.8@35.5,66.19 ccw(c36.19,66.19) 36.19,65.5 49.46,65.5 ccw(c49.46,68.04) 52,68.04 R710.1@52,69.95 57.2,69.95 ccw(c57.2,70) R709.2@57.25,70 Voltage_DCBus1.1@57.25,73.75
VREF_HV_Detection: R708.3 TP703.1 U702.9 | length 36.4
  Top Layer w0.2: R708.3@14,62.71 14.653,62.71 ccw(c14.653,64.307) 16.25,64.307 16.25,69.5 ccw(c14,69.5) TP703.1@14,71.75
  Bottom Layer w0.2: R708.3@14,62.71 14.71,62.71 ccw(c14.71,64.25) 16.25,64.25 16.25,64.92 cw(c18.79,64.92) 18.79,67.46 U702.9@35.5,67.46
pads on no net: J1.A J3. J4. J6. U101.10 U101.11 U101.12 U101.13 U201.6 U201.8 U202.4 U202.5 U202.6 U301.11 U301.12 U301.13 U302.10 U302.11 U302.12 U302.13 U401.3 U401.4 U401.5 U401.6 U401.10 U401.11 U401.12 U401.13 U502.6 U502.8 U502.9 U502.10 U502.11 U502.12 U502.13 U702.1 U702.2 U702.4 U702.5 U702.6 U702.7 U702.10 U702.11 U702.13
copper on no net:
  other v3: 101.1,65.1 7.9,65.3 101.1,74.2 7.9,74.4

## Polygon pours and split planes (outlines as drawn)
GND on Bottom Layer "GND_L04_P006" (solid, pour order 6): 0,23.414 0,72 0,72.186 cw(c3.414,72.186) 3.414,75.6 106.5,75.6 106.586,75.6 cw(c106.586,72.186) 110,72.186 110,72 110,23.414 cw(c106.586,23.414) 106.586,20 106.5,20 3.414,20 cw(c3.414,23.414)
GND on Top Layer "GND_L01_P005" (solid, pour order 5): 0,23.414 0,72 0,72.186 cw(c3.414,72.186) 3.414,75.6 106.5,75.6 106.586,75.6 cw(c106.586,72.186) 110,72.186 110,72 110,23.414 cw(c106.586,23.414) 106.586,20 106.5,20 3.414,20 cw(c3.414,23.414)
GND on GND "GND_L02_P007" (solid, pour order 7): 3.414,20 cw(c3.414,23.414) 0,23.414 0,72 0,72.186 cw(c3.414,72.186) 3.414,75.6 106.5,75.6 106.586,75.6 cw(c106.586,72.186) 110,72.186 110,72 110,23.414 cw(c106.586,23.414) 106.586,20 106.5,20
+12 on PWR "+12_L03_P008" (solid, pour order 8): 3.414,20 cw(c3.414,23.414) 0,23.414 0,72 0,72.186 cw(c3.414,72.186) 3.414,75.6 106.5,75.6 106.586,75.6 cw(c106.586,72.186) 110,72.186 110,72 110,23.414 cw(c106.586,23.414) 106.586,20 106.5,20

## Other copper
Top Layer:
  pour cut-out: 0,75.5 0,53.5 28,53.5 35.5,61 88.75,61 96.25,53.5 110,53.5 110,75.5
GND:
  pour cut-out: 110,53.75 96,53.75 88.75,61 35.5,61 28.25,53.75 0,53.75 0,75.5 110,75.5
PWR:
  pour cut-out: 110,53.75 96,53.75 88.75,61 35.5,61 28.25,53.75 0,53.75 0,75.5 110,75.5
  pour cut-out: 18.081,49.52 18.242,49.718 18.625,49.718 19.698,49.718 20.258,49.158 20.258,47.762 19.728,47.233 18.272,47.233 17.773,47.732 17.773,49.212
  pour cut-out: 85.295,43.95 85.978,43.95 86.625,43.303 86.625,42.097 86.063,41.535 84.857,41.535 84.21,42.182 84.21,43.218 84.942,43.95
Bottom Layer:
  pour cut-out: 0,75.5 0,53.5 28,53.5 35.5,61 88.75,61 96.25,53.5 110,53.5 110,75.5

## Silkscreen, mask and mechanical layers (free items; w line width, h text height)
Top Overlay:
  drawing of 71 lines, arcs and shapes, not listed
  text "R_Dsch-" at 1.208,73.248 h2.5 r270
  text "Discharge Relay" at 98.067,72.748 h2.5 r270
  text "R_Dsch+" at 107.208,71.998 h2.5 r270
  text "TS" at 17.506,69.5 h7
  text "TS" at 91.506,66.25 h7
  text "TS-" at 0.75,61.998 h2.5 r270
  text "TS+" at 107.5,61.998 h2.5 r270
  text "4 mm" at 55,61.75 h1.7 r90
  text "4 mm" at 104.75,54.5 h1.7 r90
  text "4 mm" at 5.5,54.25 h1.7 r90
  text "LV" at 26.006,50 h7
  text "GND" at 79.25,21 h2 r90
  text "SC END" at 87.75,21.002 h2 r90
Bottom Overlay:
  drawing of 31 lines, arcs and shapes, not listed
  text "TS" at 49.504,68.659 h7
  text "4 mm" at 54.75,64.5 h1.7 r90
  text "TS" at 99.744,61 h7
  text "TS" at 12.994,59 h7
  text "4 mm" at 104.75,57.5 h1.7 r90
  text "4 mm" at 5.25,57 h1.7 r90
  text "LV" at 87.744,56.75 h7
  text "TSAL CONTROL 2025" at 108.748,41.5 h2.5
  text "Guillem Ropero" at 108.75,39.775 h2.5
  text "LV" at 20.744,23 h7
Mechanical 1:
  lines w1: 0,72 0,23.414 ccw(c3.414,23.414) 3.414,20 106.5,20 ; 0,72.186 cw(c3.414,72.186) 3.414,75.6 106.5,75.6 ; 106.586,20 ccw(c106.586,23.414) 110,23.414 110,72 ; 106.586,75.6 cw(c106.586,72.186) 110,72.186

## Text inside footprints (layer, text, board x,y; h text height)
C1: Top Overlay "+" at 91.75,33.2 h1.7 r90
C2: Top Overlay "+" at 98.85,40 h1.7 r180
C3: Top Overlay "+" at 72.25,44.15 h1.7 r90
C4: Top Overlay "+" at 78.5,44.2 h1.7 r90